# EAGLE board v1 (EAGLE 7.3.0)
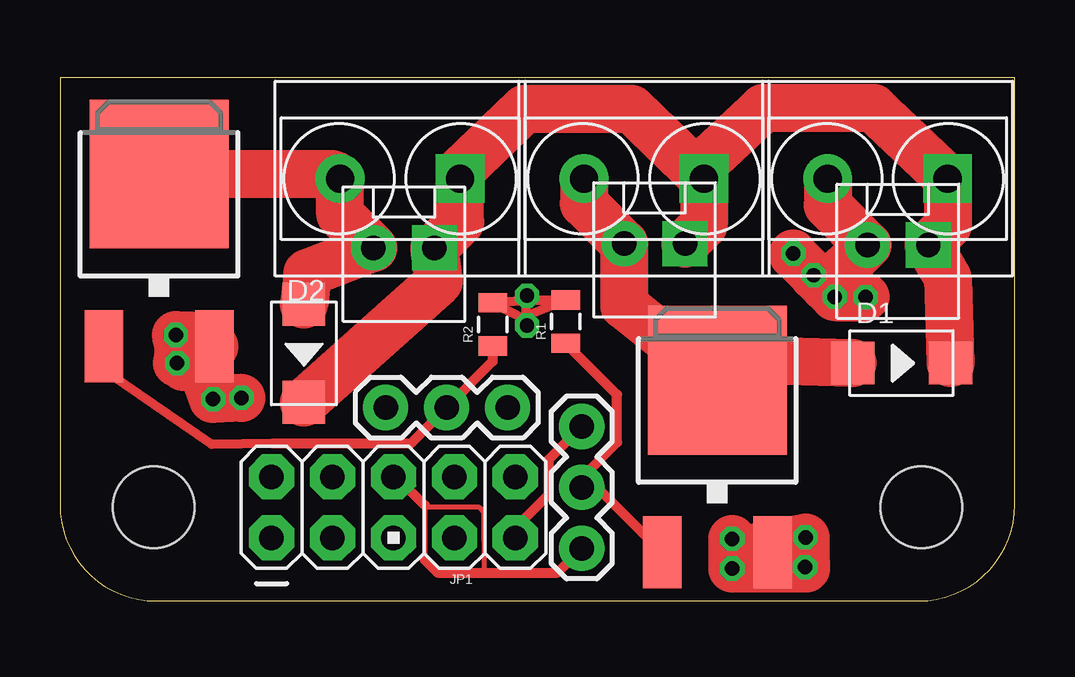
[diagram p0: board, top side]
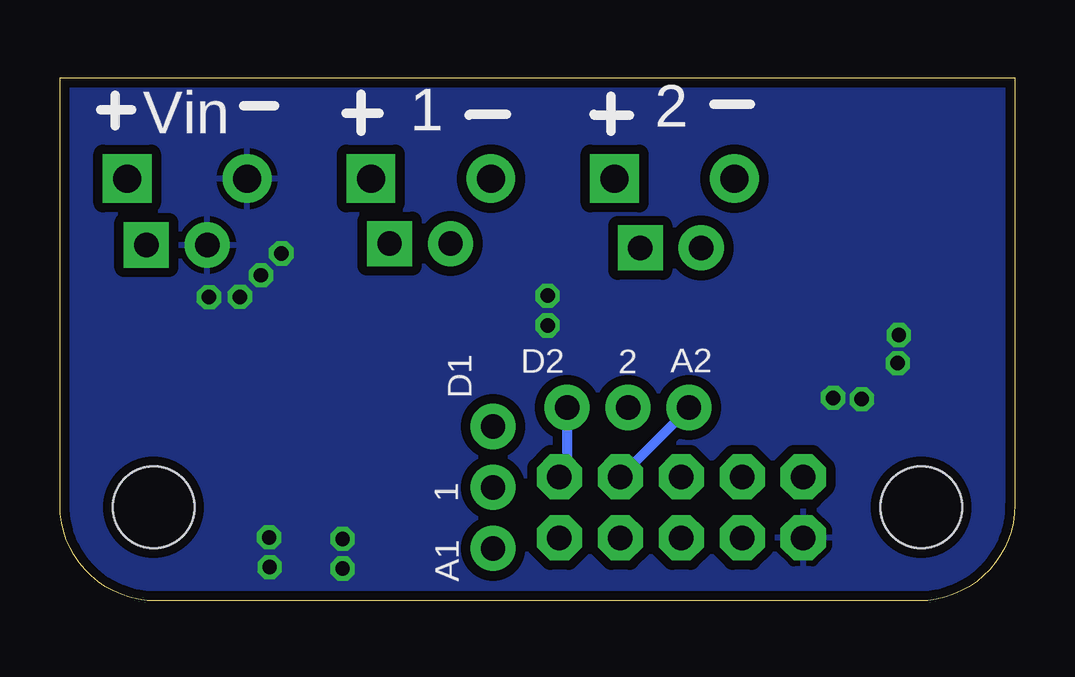
[diagram p1: board, bottom side, seen from below]

Size 39.8 x 21.8 mm. Coordinates in mm from the lower left corner, seen from the top.
Outline: 0,21.8 0,4 arc90 4,0 35.8,0 arc90 39.8,4 39.8,21.8 0,21.8
Copper layers (1*16): Top 0.035mm / dielectric 1.5mm / Bottom 0.035mm
Design rules "DFRobot_Eagle_Rule_v0.4": minimum track width 6mil, minimum drill 12mil, track to track 6mil, track to pad 6mil, pad to pad 6mil, via to via 6mil, smd to smd 0mil, copper to edge 10mil, drill to drill 10mil, minimum pad ring 12mil, minimum via ring 8mil, stop-mask expansion 2mil, vias tented up to drill 25mil, thermal gap 10mil
Holes 3.4 mm at 3.9,3.9 35.9,3.9

## Footprints (pad centres in the part's own frame; a part is rotated, then mirrored left to right if it is on the bottom)
DO-214AC = smd 1.8 x 1.77: 1 -2.042,0; 2 2.042,0
AVR_ICSP = drill 1.016 pad 1.88 octagon: 1 -1.27,5.08; 2 1.27,5.08; 3 -1.27,2.54; 4 1.27,2.54; 5 -1.27,0; 6 1.27,0; 7 -1.27,-2.54; 8 1.27,-2.54; 9 -1.27,-5.08; 10 1.27,-5.08
MOLEX-1X2 = drill 1.016 pad 1.88 square: 1 0,0 | drill 1.016 pad 1.88: 2 2.54,0
1X03 = drill 1.016 pad 1.88: 1 0,0; 2 2.54,0; 3 5.08,0
DPAK = smd 3 x 1.6: 1 0,-2.3; 2 0,2.3 | smd 6.2 x 5.8: 3 -7.18,0
0805 = smd 0.8 x 1.2: 1 -0.9,0; 2 0.9,0
H2-5.0-10.5X8.0MM = drill 1.168 pad 2.032 square: 1 0,2.5 | drill 1.168 pad 2.032: 2 0,-2.5

## Placement (x,y rotation side)
D1  DIODE-GEN-PURPOSE-1KV-1A(DO-214AC)  [DO-214AC]  35.08,9.91 0 top
D2  DIODE-GEN-PURPOSE-1KV-1A(DO-214AC)  [DO-214AC]  10.17,10.32 270 top
JP1  [AVR_ICSP]  13.9,3.9 90 top
JP2  [MOLEX-1X2]  26.06,14.89 180 top
JP3  [MOLEX-1X2]  15.61,14.71 180 top
JP4  [MOLEX-1X2]  36.2,14.83 180 top
JP5  [1X03]  21.75,7.27 270 top
JP6  [1X03]  13.58,8.06 0 top
Q1  40V 51A  [DPAK]  27.4,2.02 270 top
Q2  40V 51A  [DPAK]  4.13,10.61 270 top
R1  100K  [0805]  21.08,11.64 90 top
R2  100K  [0805]  18.04,11.52 90 top
U$1  2p-5.08  [H2-5.0-10.5X8.0MM]  24.34,17.6 270 top
U$2  2p-5.08  [H2-5.0-10.5X8.0MM]  14.18,17.6 270 top
U$3  2p-5.08  [H2-5.0-10.5X8.0MM]  34.5,17.6 270 top

## Library data of the parts
D1 D2 = Seeed-OPL-Diode; MPN: 1N4007
JP1-JP6 = SparkFun-Connectors
Q1 Q2 = Seeed-OPL-Transistor; MPN: NTD5805NT4G
R1 R2 = SparkFun-Passives
U$1-U$3 = Seeed-OPL-Connector; MPN: GS009S-2P-2

## Nets
GND: JP1.1 JP4.2 Q1.2 Q2.2 R1.2 R2.2 U$3.2
N$1: D1.2 D2.2 JP2.1 JP3.1 JP4.1 U$1.1 U$2.1 U$3.1
N$2: D2.1 JP3.2 Q2.3 U$2.2
N$3: D1.1 JP2.2 Q1.3 U$1.2
N$4: JP5.2 Q1.1 R1.1
N$5: JP6.2 Q2.1 R2.1
N$6: JP1.9 JP5.1
N$7: JP1.10 JP6.3
N$8: JP1.6 JP5.3
N$9: JP1.8 JP6.1

## Tracks (layer width: path | path; a pad name or v marks a point on that pad's centre or on a via)
GND  (via drill 0.6)
  Top 0.4: v19.47,12.72 19.41,11.71 R2.2 19.58,12.54 R1.2 19.55,11.92 v19.47,11.48
  Top 2: Q1.2 29.34,2.36 v31.08,2.65 | v28.02,2.59 v28.02,1.35 31.11,1.36 v31.08,2.65 | v31.08,2.65 v31.06,1.41 | v7.57,8.46 v6.38,8.41 5.43,11.06 v4.83,11.08 | v4.83,11.08 4.97,10.66 v4.88,9.91 | v4.83,11.08 5.14,9.75 Q2.2 | U$3.2 32,16.49 JP4.2 31.91,13.09 31.88,13.09 | v30.57,14.48 30.57,14.42 v31.42,13.57 31.42,13.55 31.88,13.09 | 31.88,13.09 v32.3,12.67 v32.31,12.66 v33.59,12.66
  pour Bottom (isolate 0.4): 0.2,21.49 39.59,21.49 39.59,0.06 0.22,0.06 0.22,10.55
N$1
  Top 2: U$1.1 26.84,15.67 JP2.1 | D1.2 37.01,13.45 JP4.1 37,15.63 U$3.1 33.91,20.54 29.32,20.54 26.84,18.21 U$1.1 | D2.2 15.8,13.31 JP3.1 16.68,15.78 U$2.1 16.68,17.93 19.36,20.5 23.83,20.5 U$1.1
N$2
  Top 2: Q2.3 11.22,17.79 arc-45 U$2.2 11.68,16.1 JP3.2 10.32,13.66 D2.1
N$3
  Top 2: D1.1 28.13,10.05 26.32,9.58 26.32,9.52 Q1.3 23.52,12.32 JP2.2 21.84,16.57 U$1.2
N$4
  Top 0.406: Q1.1 22.39,4.73 JP5.2 21.75,5.14 23.22,6.61 23.22,8.6 R1.1
N$5
  Top 0.4: 8.87,6.57 6.32,6.52 1.83,9.64 Q2.1
  Top 0.406: 8.87,6.57 14.63,6.57 JP6.2 18.04,9.98 R2.1
N$6
  Top 0.406: JP1.9 18.98,3.05 20.38,4.45 20.38,5.9 JP5.1
N$7
  Bottom 0.406: JP6.3 18.66,5.49 JP1.10
N$8
  Top 0.2: 15.2,1.71 15.2,3.99 15.29,3.9 17.48,3.9 17.68,3.7 17.69,1.26
  Top 0.406: JP1.6 14.02,5.17 15.2,3.99 | 15.2,1.71 15.73,1.18 20.74,1.18 JP5.3
N$9
  Bottom 0.406: JP6.1 13.58,8.03 JP1.8

## Text on the board
bPlace: 2 | 1 | Vin | A2 | 2 | D2 | D1 | 1 | A1